# EAGLE board VCU_itr2 (EAGLE 9.6.2)

Size 160 x 100 mm. Coordinates in mm from the lower left corner, seen from the top.
Outline: 0,0 160,0 160,100 0,100 0,0
Copper layers (1*16): Top 0.035mm / dielectric 1.5mm / Bottom 0.035mm
Design rules "default": minimum track width 6mil, minimum drill 0.35mm, track to track 6mil, track to pad 6mil, pad to pad 6mil, via to via 6mil, smd to smd 6mil, copper to edge 40mil, drill to drill 6mil, minimum pad ring 10mil, minimum via ring 8mil, stop-mask expansion 4mil, vias tented up to drill 0mil, thermal gap 10mil

## Footprints (pad centres in the part's own frame; a part is rotated, then mirrored left to right if it is on the bottom)
43045-0612 = drill 1.02 square: P$1 3,0 | drill 1.02: P$2 0,0; P$3 -3,0; P$4 3,3; P$5 0,3; P$6 -3,3 | hole 1.02: 6,3.94; -6,3.94
C1210 = smd 1.6 x 2.7: 1 -1.4,0; 2 1.4,0
C0805 = smd 1.3 x 1.5: 1 -0.95,0; 2 0.95,0
SMC_A = smd 1.6 x 1.4: + -1.5,0; - 1.5,0
E2,5-6 = drill 0.813 pad 1.6: + -1.27,0 | drill 0.813 pad 1.6 octagon: - 1.27,0
DO214AC = smd 1.8 x 1.7: A 2.05,0; C -2.05,0
SOD-123_MINI-SMA = smd 1.5 x 2.1: A 1.8,0; C -1.8,0
1206L = smd 2.16 x 1.4: P$1 -1.85,0; P$2 1.85,0
SOIC127P600X175-8N = smd 1.528 x 0.65: 1 -2.711,1.905; 2 -2.711,0.635; 3 -2.711,-0.635; 4 -2.711,-1.905; 5 2.711,-1.905; 6 2.711,-0.635; 7 2.711,0.635; 8 2.711,1.905
DIL14 = drill 0.813 long: 1 -7.62,-3.81; 2 -5.08,-3.81; 3 -2.54,-3.81; 4 0,-3.81; 5 2.54,-3.81; 6 5.08,-3.81; 7 7.62,-3.81; 8 7.62,3.81; 9 5.08,3.81; 10 2.54,3.81; 11 0,3.81; 12 -2.54,3.81; 13 -5.08,3.81; 14 -7.62,3.81
SOIC127P600X175-8N' = smd 1.525 x 0.7: 1 -2.712,1.905; 2 -2.712,0.635; 3 -2.712,-0.635; 4 -2.712,-1.905; 5 2.712,-1.905; 6 2.712,-0.635; 7 2.712,0.635; 8 2.712,1.905
TO255P460X1020X2008-3P = drill 1.32 pad 1.98 square: 1 0,0 | drill 1.32 pad 1.98: 2 2.55,0; 3 5.1,0
SOIC127P600X175-16N = smd 1.55 x 0.65: 1 -2.725,4.445; 2 -2.725,3.175; 3 -2.725,1.905; 4 -2.725,0.635; 5 -2.725,-0.635; 6 -2.725,-1.905; 7 -2.725,-3.175; 8 -2.725,-4.445; 9 2.725,-4.445; 10 2.725,-3.175; 11 2.725,-1.905; 12 2.725,-0.635; 13 2.725,0.635; 14 2.725,1.905; 15 2.725,3.175; 16 2.725,4.445
SO14 = smd 0.6 x 2.2: 1 -3.81,-2.6; 2 -2.54,-2.6; 3 -1.27,-2.6; 4 0,-2.6; 5 1.27,-2.6; 6 2.54,-2.6; 7 3.81,-2.6; 8 3.81,2.6; 9 2.54,2.6; 10 1.27,2.6; 11 0,2.6; 12 -1.27,2.6; 13 -2.54,2.6; 14 -3.81,2.6
M0805 = smd 1.3 x 1.6: 1 -0.95,0; 2 0.95,0
R0805 = smd 1.1 x 1.4: 1 -1,0; 2 1,0
TSOP-6_PMOS = smd 0.5 x 1.92: 1 -1,-0.96; 6 -1,0.96 | smd 0.5 x 1.52: 2 0,-1.16; 5 0,1.16 | smd 0.635 x 1.27: D -0.5,0 | smd 0.75 x 1.2: G 1.13,-1.4; S 1.13,1.4
SOIC-8 = smd 0.6 x 2.1: 1 -1.905,-3; 2 -0.635,-3; 3 0.635,-3; 4 1.905,-3; 5 1.905,3; 6 0.635,3; 7 -0.635,3; 8 -1.905,3
G6DN_RELAY = drill 1.118 pad 1.575: P$1 0.889,3.708; P$2 3.429,3.708; P$3 11.049,3.708; P$4 18.669,3.708
TSOP-6_NMOS = smd 0.5 x 1.92: 1 -1,-0.96; 6 -1,0.96 | smd 0.5 x 1.52: 2 0,-1.16; 5 0,1.16 | smd 0.635 x 1.27: D -0.5,0 | smd 0.75 x 1.2: G 1.13,-1.4; S 1.13,1.4
SFM_RELAY = drill 1.3: NC+ -13.47,5.56; NC- -13.47,-6.45; NO+ 14.52,5.55; NO- 14.52,-6.45; V+ -7.24,1.46; V- 6.47,1.46
44914-1201 = drill 1.09 square: P$1 7.5,0 | drill 1.09: P$2 4.5,0; P$3 1.5,0; P$4 -1.5,0; P$5 -4.5,0; P$6 -7.5,0; P$7 7.5,3; P$8 4.5,3; P$9 1.5,3; P$10 -1.5,3; P$11 -4.5,3; P$12 -7.5,3 | hole 1.02: 10.5,3.94; -10.5,3.94

## Placement (x,y rotation side)
BMS-CONN7  [43045-0612]  -67.31,29.21 0 top  (outside the outline)
C2  0.01uf  [C1210]  -78.74,30.48 0 top  (outside the outline)
C3  1uF  [C0805]  -39.37,40.64 0 top  (outside the outline)
C4  1uF  [SMC_A]  -58.42,73.66 0 top  (outside the outline)
C5  0.1uF  [C0805]  -34.29,40.64 0 top  (outside the outline)
C6  0.33uF  [C0805]  -27.94,40.64 0 top  (outside the outline)
C7  2uF  [E2,5-6]  -19.05,40.64 0 top  (outside the outline)
D1  [DO214AC]  -64.77,72.39 0 top  (outside the outline)
D2  CGRM400-G  [SOD-123_MINI-SMA]  -74.93,46.99 0 top  (outside the outline)
FUSE_1A1  1206L  [1206L]  -71.12,72.39 0 top  (outside the outline)
IC1  UCC2946D  [SOIC127P600X175-8N]  -35.56,73.66 0 top  (outside the outline)
IC2  4081N  [DIL14]  -62.23,6.35 0 top  (outside the outline)
IC3  4071N  [DIL14]  -22.86,20.32 0 top  (outside the outline)
IC4  4081N  [DIL14]  -43.18,20.32 0 top  (outside the outline)
IC5  SI4425FDY-T1-GE3  [SOIC127P600X175-8N']  -57.15,67.31 0 top  (outside the outline)
IC6  L7805CV-DG  [TO255P460X1020X2008-3P]  -49.53,72.39 0 top  (outside the outline)
IC7  SI4425FDY-T1-GE3  [SOIC127P600X175-8N']  -21.59,73.66 0 top  (outside the outline)
IC8  4081N  [DIL14]  -63.5,20.32 0 top  (outside the outline)
IC11  74HC238D  [SOIC127P600X175-16N]  -17.78,31.75 0 top  (outside the outline)
IC12  LM324D  [SO14]  -29.21,30.48 0 top  (outside the outline)
R1  51k  [M0805]  -15.24,67.31 0 top  (outside the outline)
R2  10k  [M0805]  -20.32,67.31 0 top  (outside the outline)
R3  10k  [M0805]  -25.4,67.31 0 top  (outside the outline)
R4  10k  [M0805]  -30.48,67.31 0 top  (outside the outline)
R5  100k  [M0805]  -73.66,54.61 0 top  (outside the outline)
R6  10k  [M0805]  -35.56,67.31 0 top  (outside the outline)
R7  100k  [M0805]  -16.51,60.96 0 top  (outside the outline)
R8  10k  [M0805]  -40.64,67.31 0 top  (outside the outline)
R9  10k  [M0805]  -45.72,67.31 0 top  (outside the outline)
R10  10k  [M0805]  -38.1,60.96 0 top  (outside the outline)
R11  100k  [R0805]  -16.51,54.61 0 top  (outside the outline)
R12  100k  [R0805]  -22.86,54.61 0 top  (outside the outline)
R13  10k  [R0805]  -27.94,60.96 0 top  (outside the outline)
R14  100k  [M0805]  -22.86,60.96 0 top  (outside the outline)
R15  10k  [M0805]  -43.18,60.96 0 top  (outside the outline)
R20  100k  [R0805]  -29.21,54.61 0 top  (outside the outline)
R21  10k  [M0805]  -48.26,60.96 0 top  (outside the outline)
R23  10k  [R0805]  -33.02,60.96 0 top  (outside the outline)
R29  100k  [R0805]  -35.56,54.61 0 top  (outside the outline)
R30  10k  [M0805]  -53.34,60.96 0 top  (outside the outline)
R31  100k  [R0805]  -41.91,54.61 0 top  (outside the outline)
R32  10k  [M0805]  -58.42,60.96 0 top  (outside the outline)
R33  100k  [R0805]  -48.26,54.61 0 top  (outside the outline)
R34  10k  [M0805]  -63.5,60.96 0 top  (outside the outline)
R36  100k  [R0805]  -54.61,54.61 0 top  (outside the outline)
R37  10k  [M0805]  -68.58,60.96 0 top  (outside the outline)
R38  100k  [R0805]  -60.96,54.61 0 top  (outside the outline)
R39  10k  [M0805]  -73.66,60.96 0 top  (outside the outline)
R40  100k  [R0805]  -67.31,54.61 0 top  (outside the outline)
R41  10k  [M0805]  -78.74,60.96 0 top  (outside the outline)
SI1  TSOP-6_PMOS  [TSOP-6_PMOS]  -26.67,48.26 0 top  (outside the outline)
SI2  TSOP-6_PMOS  [TSOP-6_PMOS]  -31.75,48.26 0 top  (outside the outline)
SI3  TSOP-6_PMOS  [TSOP-6_PMOS]  -36.83,48.26 0 top  (outside the outline)
SI4  TSOP-6_PMOS  [TSOP-6_PMOS]  -41.91,48.26 0 top  (outside the outline)
U$1  NCV2903  [SOIC-8]  -49.53,6.35 0 top  (outside the outline)
U$2  G6DN_RELAY  [G6DN_RELAY]  -64.77,45.72 0 top  (outside the outline)
U$3  TSOP-6_NMOS  [TSOP-6_NMOS]  -45.72,40.64 0 top  (outside the outline)
U$4  TSOP-6_NMOS  [TSOP-6_NMOS]  -50.8,40.64 0 top  (outside the outline)
U$5  TSOP-6_NMOS  [TSOP-6_NMOS]  -55.88,40.64 0 top  (outside the outline)
U$6  TSOP-6_NMOS  [TSOP-6_NMOS]  -60.96,40.64 0 top  (outside the outline)
U$7  TSOP-6_NMOS  [TSOP-6_NMOS]  -66.04,40.64 0 top  (outside the outline)
U$8  TSOP-6_NMOS  [TSOP-6_NMOS]  -71.12,40.64 0 top  (outside the outline)
U$9  SFM_RELAY  [SFM_RELAY]  -30.48,7.62 0 top  (outside the outline)
U$10  TSOP-6_NMOS  [TSOP-6_NMOS]  -76.2,40.64 0 top  (outside the outline)
U$11  TSOP-6_NMOS  [TSOP-6_NMOS]  -16.51,48.26 0 top  (outside the outline)
U$12  TSOP-6_NMOS  [TSOP-6_NMOS]  -21.59,48.26 0 top  (outside the outline)
X2  [44914-1201]  -48.26,29.21 0 top  (outside the outline)

## Library data of the parts
BMS-CONN7 = con-molex-micro-fit-3_0
C2-C4 C7 D2 R11-R13 R20 R23 R29 R31 R33 R36 R38 R40 X2 = IIT_BOMBAY_Racing
C5 C6 = rcl; SPICEPREFIX: C
D1 = diode
FUSE_1A1 R1-R10 R14 R15 R21 R30 R32 R34 R37 R39 R41 U$1 = IIT_BOMBAY_Racing2
IC1 = UCC2946D; ARROW_PART_NUMBER: UCC2946D; ARROW_PRICE-STOCK: https://www.arrow.com/en/products/ucc2946d/texas-instruments?region=nac; DESCRIPTION: Texas Instruments UCC2946D, Processor Supervisor 2.1 5.5 V, WDT, Reset Input, 8-Pin SOIC; HEIGHT: 1.75mm; MANUFACTURER_NAME: Texas Instruments; MANUFACTURER_PART_NUMBER: UCC2946D; MOUSER_PART_NUMBER: 595-UCC2946D; MOUSER_PRICE-STOCK: https://www.mouser.co.uk/ProductDetail/Texas-Instruments/UCC2946D?qs=eJkN62t4xTUTFIqfTGcQjw%3D%3D
IC2-IC4 IC8 = 40xx
IC5 IC7 = SamacSys_Parts; DESCRIPTION: MOSFET P-CHANNEL 30-V (D-S) MOSFET; HEIGHT: 1.75mm; MANUFACTURER_NAME: Vishay; MANUFACTURER_PART_NUMBER: SI4425FDY-T1-GE3; MOUSER_PART_NUMBER: 78-SI4425FDY-T1-GE3; MOUSER_PRICE-STOCK: https://www.mouser.co.uk/ProductDetail/Vishay-Siliconix/SI4425FDY-T1-GE3?qs=%252B6g0mu59x7IUQKSn86z1oQ%3D%3D
IC6 = SamacSys_Parts; DESCRIPTION: Voltage Regulator 5V 4% 1.5A TO220 L7805CV-DG, Linear Voltage Regulator, Current Limit, Shut-Down 1.5A 5 V, 3-Pin TO220; HEIGHT: 4.6mm; MANUFACTURER_NAME: STMicroelectronics; MANUFACTURER_PART_NUMBER: L7805CV-DG; MOUSER_PART_NUMBER: 511-L7805CV-DG; MOUSER_PRICE-STOCK: https://www.mouser.co.uk/ProductDetail/STMicroelectronics/L7805CV-DG?qs=T%2FOtf55vL7c3O0as9P9fAw%3D%3D
IC11 = 74HC238D; ARROW_PART_NUMBER: 74HC238D; ARROW_PRICE-STOCK: https://www.arrow.com/en/products/74hc238d/toshiba?region=nac; DESCRIPTION: (1) High speed: tpd = 14 ns (typ.) at VCC = 5 V (2) Low power dissipation: ICC = 4.0 A (max) at T a = 25 (3) Balanced propagation delays: tPLH tPHL (4) Wide operating voltage range: VCC(opr) = 2.0 V to 6.0 V; HEIGHT: 1.75mm; MANUFACTURER_NAME: Toshiba; MANUFACTURER_PART_NUMBER: 74HC238D; MOUSER_PART_NUMBER: 757-74HC238D; MOUSER_PRICE-STOCK: https://www.mouser.co.uk/ProductDetail/Toshiba/74HC238D?qs=7EBvPakHacU5yOgCN8ruRw%3D%3D
IC12 = linear
SI1-SI4 = TSOP-6_MOS
U$2 = G6DN_Omron
U$3-U$8 U$10-U$12 = ACU-MOSFET-updated
U$9 = bypass_relay

## Nets
2V_REF: R1.1 R2.2 U$1.2 U$1.5
3V3: IC11.6 IC11.16
+3V3: IC1.8
+5V: C5.1 IC6.3
+12V: C6.1 C7.+ IC2.14 IC3.14 IC4.14 IC5.1 IC5.2 IC5.3 IC6.1 IC7.1 IC7.2 IC7.3 IC8.14 R1.2 R5.1 R7.1 R8.1 R9.1 R13.2 R14.1 R23.2 SI1.S SI2.S SI3.S SI4.S U$1.8 U$5.1 U$5.2 U$5.5 U$5.6 U$5.D U$6.1 U$6.2 U$6.5 U$6.6 U$6.D U$7.1 U$7.2 U$7.5 U$7.6 U$7.D U$8.1 U$8.2 U$8.5 U$8.6 U$8.D U$10.1 U$10.2 U$10.5 U$10.6 U$10.D U$11.1 U$11.2 U$11.5 U$11.6 U$11.D U$12.1 U$12.2 U$12.5 U$12.6 U$12.D X2.P$11
+12V_AS: C2.2 D1.C U$9.NO+ U$9.V+ X2.P$9
+12V_IN: C4.+ FUSE_1A1.P$1
ACCELERATION: R20.1 R21.2 U$5.S
ACCELERATION_IN: IC11.15 R20.2 U$5.G
AS_LOGIC: C3.2 D2.C IC3.3 U$2.P$1
ASMS_STATE: IC2.2 IC4.6 R5.2 SI2.G U$9.NO- X2.P$10
ASMS_STATE_INV: IC4.2 IC4.8 R6.2 SI2.1 SI2.2 SI2.5 SI2.6 SI2.D
AUTOCROSS: R38.1 R39.2 U$11.S
AUTOCROSS_IN: IC11.13 R38.2 U$11.G
BLUE_LED: IC7.5 IC7.6 IC7.7 IC7.8 R4.2 X2.P$5
EBS_TEST: R31.1 R32.2 U$7.S X2.P$7
EBS_TEST_IN: IC11.11 R31.2 U$7.G
FROM_IMD: U$2.P$4 X2.P$3
GND: C2.1 C3.1 C4.- C5.2 C6.2 C7.- D1.A D2.A IC1.1 IC2.7 IC3.7 IC4.7 IC6.2 IC8.7 IC11.4 IC11.5 IC11.8 IC12.11 R2.1 R3.1 R4.1 R6.1 R10.1 R11.1 R12.1 R15.1 R21.1 R30.1 R32.1 R34.1 R37.1 R39.1 R41.1 SI1.G U$1.4 U$2.P$2 U$3.S U$4.S U$9.V- X2.P$12
HV_RESET: BMS-CONN7.P$1 IC3.4
HV_RESET_CP: BMS-CONN7.P$2 IC4.1
HV_RESET_SP: BMS-CONN7.P$3 IC4.5
IN1: IC11.1 IC12.1 IC12.2
IN1_IN: IC12.3
IN2: IC11.2 IC12.6 IC12.7
IN2_IN: IC12.5
IN3: IC11.3 IC12.8 IC12.9
IN3_IN: IC12.10
INSPECTION: R33.1 R34.2 U$8.S
INSPECTION_IN: IC11.10 R33.2 U$8.G
MANUAL_DRIVING: IC4.9 R7.2 R40.1 R41.2 SI3.G U$12.S
MANUAL_DRIVING_IN: IC11.9 R40.2 U$12.G
MANUAL_DRIVING_INV: IC2.12 R10.2 SI3.1 SI3.2 SI3.5 SI3.6 SI3.D
MANUAL_VALVE: IC2.6 R14.2 SI4.G X2.P$8
MANUAL_VALVE_INV: IC4.12 R15.2 SI4.1 SI4.2 SI4.5 SI4.6 SI4.D
MISSION_SET: IC4.13 R12.2 U$4.G
MISSION_SET_12V: IC2.5 R13.1 U$4.1 U$4.2 U$4.5 U$4.6 U$4.D
N$1: IC7.4 R8.2 U$1.7
N$2: IC2.3 IC2.8
N$3: IC5.4 R9.2 U$1.1
N$4: IC4.10 IC8.1
N$5: IC2.4 IC2.9
N$6: IC4.11 IC8.2
N$8: IC2.11 IC3.1
N$9: FUSE_1A1.P$2 SI1.1 SI1.2 SI1.5 SI1.6 SI1.D
N$17: IC12.4
RES_1_IN: U$2.P$3 U$9.NC+ X2.P$1
RES_1_OUT: U$9.NC- X2.P$2
SIG1: IC2.10 IC2.13
SIG2: IC3.5 IC4.3
SIG3: IC3.6 IC4.4
SIG4: IC3.2 IC8.3
SKIDPAD: R29.1 R30.2 U$6.S
SKIDPAD_IN: IC11.14 R29.2 U$6.G
TEENSY_IN_BLUE: U$1.6
TEENSY_IN_YELLOW: U$1.3
TRACKDRIVE: R36.1 R37.2 U$10.S X2.P$6
TRACKDRIVE_IN: IC11.12 R36.2 U$10.G
WATCHDOG_IN: IC1.7
WATCHDOG_OUT: IC1.5 R11.2 U$3.G
WATCHDOG_OUT_12V: IC2.1 R23.1 U$3.1 U$3.2 U$3.5 U$3.6 U$3.D
YELLOW_LED: IC5.5 IC5.6 IC5.7 IC5.8 R3.2 X2.P$4

## Tracks (layer width: path | path; a pad name or v marks a point on that pad's centre or on a via)
2V_REF  (3 unrouted)
3V3  (1 unrouted)
+5V  (1 unrouted)
+12V  (61 unrouted)
+12V_AS  (4 unrouted)
+12V_IN  (1 unrouted)
ACCELERATION  (2 unrouted)
ACCELERATION_IN  (2 unrouted)
AS_LOGIC  (3 unrouted)
ASMS_STATE  (5 unrouted)
ASMS_STATE_INV  (7 unrouted)
AUTOCROSS  (2 unrouted)
AUTOCROSS_IN  (2 unrouted)
BLUE_LED  (5 unrouted)
EBS_TEST  (3 unrouted)
EBS_TEST_IN  (2 unrouted)
FROM_IMD  (1 unrouted)
GND  (39 unrouted)
HV_RESET  (1 unrouted)
HV_RESET_CP  (1 unrouted)
HV_RESET_SP  (1 unrouted)
IN1  (2 unrouted)
IN2  (2 unrouted)
IN3  (2 unrouted)
INSPECTION  (2 unrouted)
INSPECTION_IN  (2 unrouted)
MANUAL_DRIVING  (5 unrouted)
MANUAL_DRIVING_IN  (2 unrouted)
MANUAL_DRIVING_INV  (6 unrouted)
MANUAL_VALVE  (3 unrouted)
MANUAL_VALVE_INV  (6 unrouted)
MISSION_SET  (2 unrouted)
MISSION_SET_12V  (6 unrouted)
N$1  (2 unrouted)
N$2  (1 unrouted)
N$3  (2 unrouted)
N$4  (1 unrouted)
N$5  (1 unrouted)
N$6  (1 unrouted)
N$8  (1 unrouted)
N$9  (5 unrouted)
RES_1_IN  (2 unrouted)
RES_1_OUT  (1 unrouted)
SIG1  (1 unrouted)
SIG2  (1 unrouted)
SIG3  (1 unrouted)
SIG4  (1 unrouted)
SKIDPAD  (2 unrouted)
SKIDPAD_IN  (2 unrouted)
TRACKDRIVE  (3 unrouted)
TRACKDRIVE_IN  (2 unrouted)
WATCHDOG_OUT  (2 unrouted)
WATCHDOG_OUT_12V  (6 unrouted)
YELLOW_LED  (5 unrouted)